# Altium PCB Socket.PcbDoc
Units mm, origin at the board's own origin, x right, y up, seen from the top; angles counter-clockwise.
Board outline 22.96 x 17.78 mm, 2 copper layers (F.Cu, B.Cu); 9 components, 4 nets, 53 pads, 44 vias.
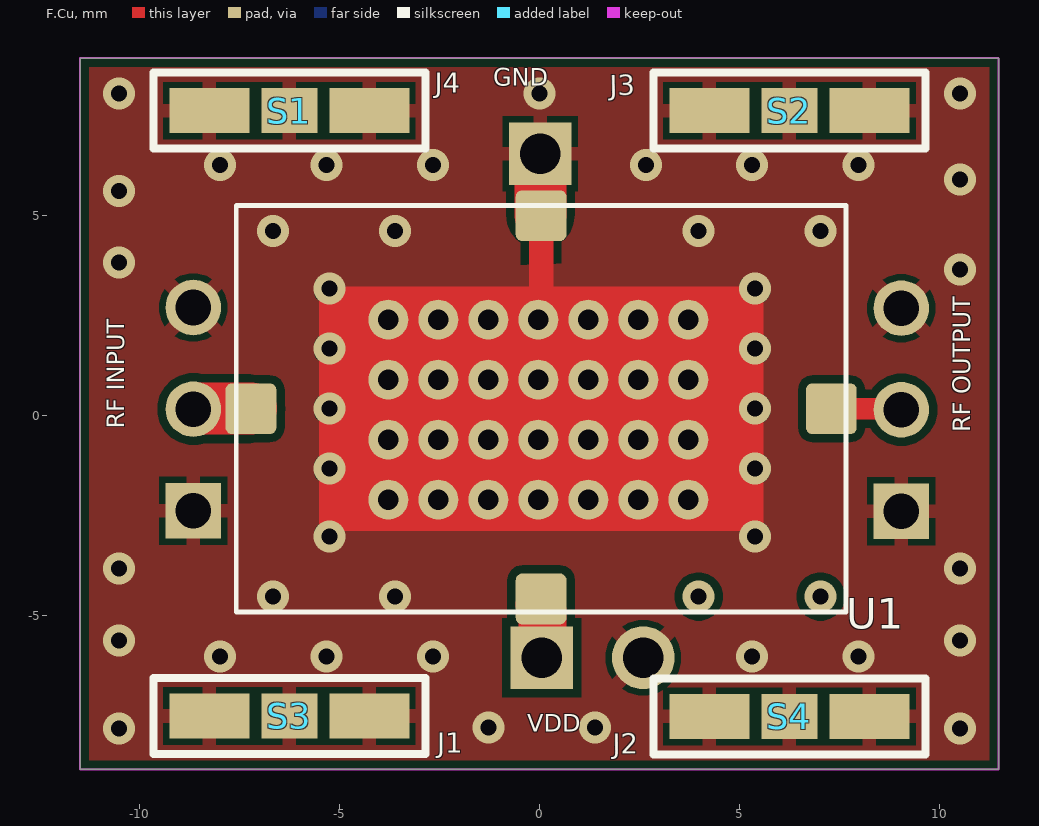
[diagram p0: F.Cu view]
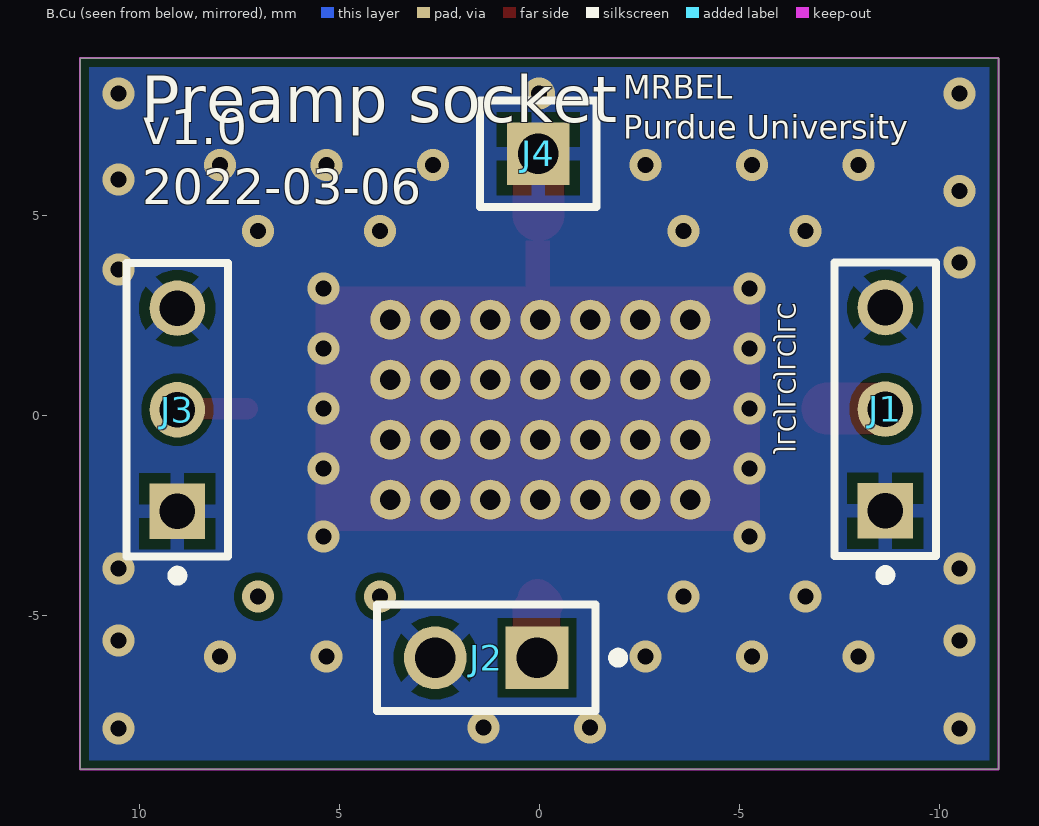
[diagram p1: B.Cu view, seen from below]
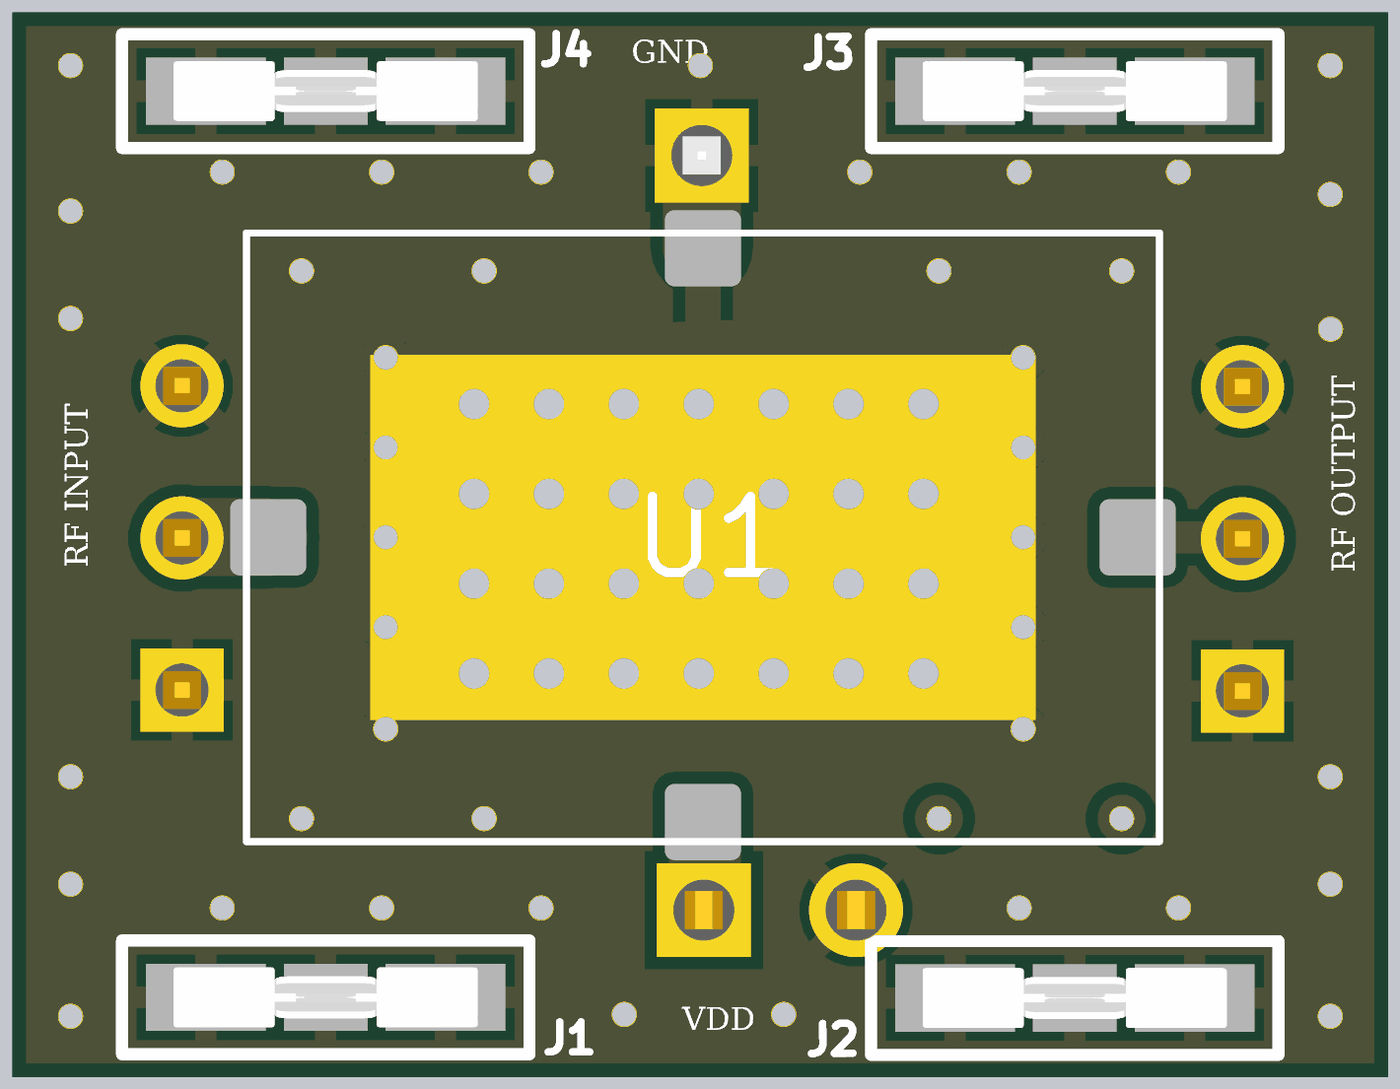
[diagram p2: 3D render of the assembled board from above, using the file's embedded part models]
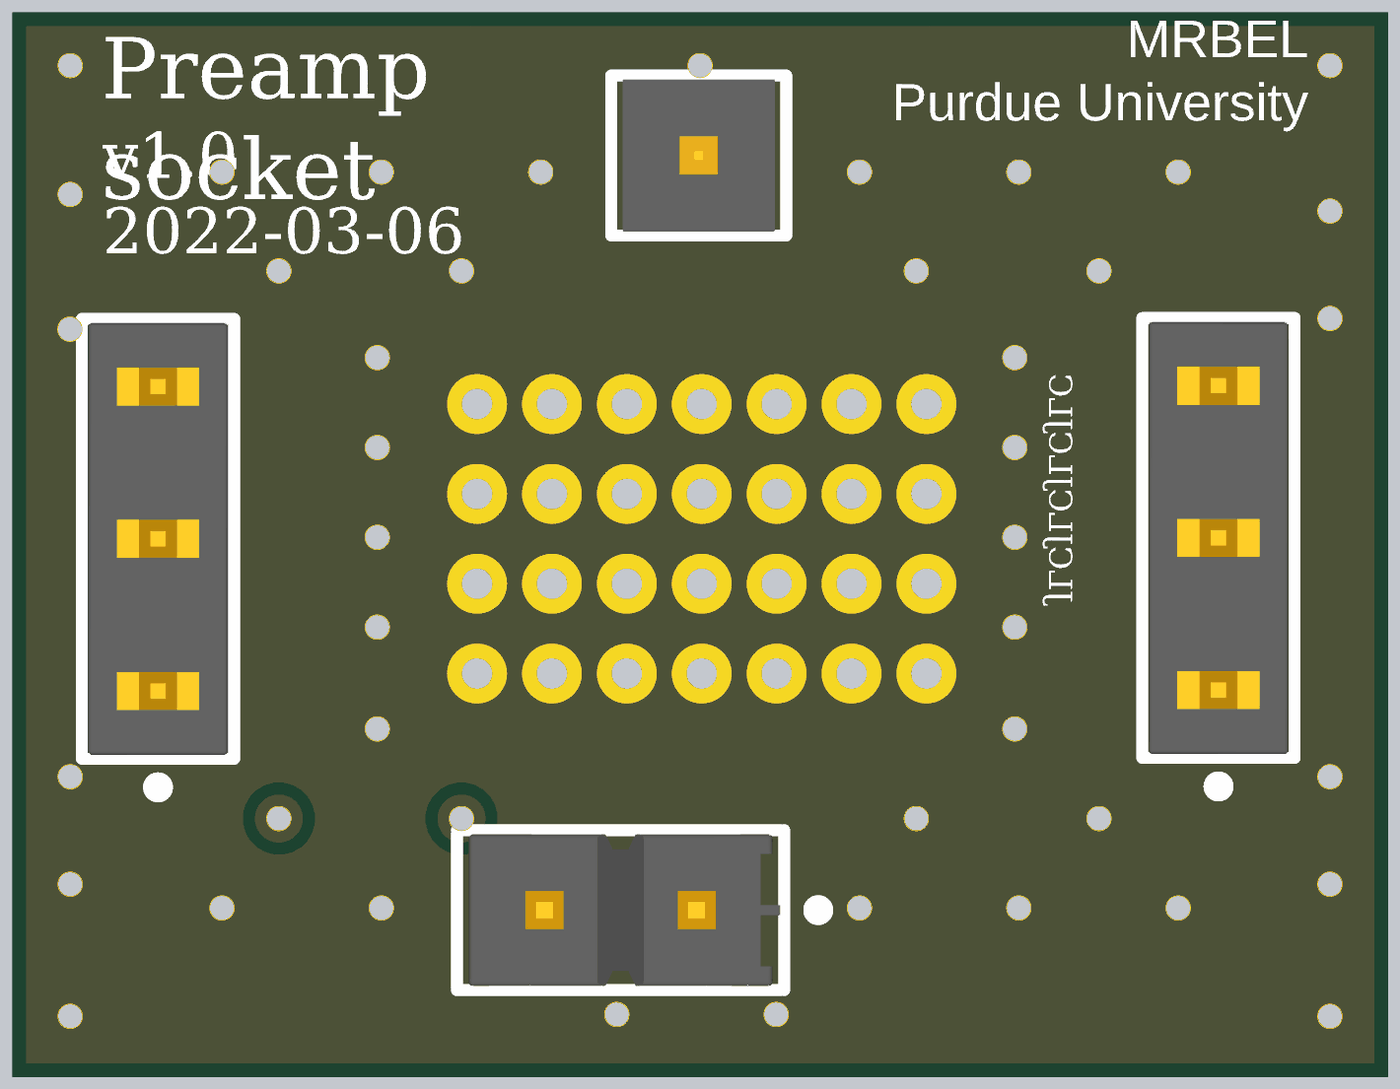
[diagram p3: 3D render of the assembled board from below, using the file's embedded part models]

## Layer stack, top to bottom
F.Mask: solder mask 0.0102, Solder Resist, Dk 3.5
F.Cu: signal copper 0.0356
Dielectric 1: dielectric 0.32, FR-4, Dk 4.8
B.Cu: signal copper 0.0356
B.Mask: solder mask 0.0102, Solder Resist, Dk 3.5

## Board outline
11.481,-8.839 -11.481,-8.839 -11.481,8.941 11.481,8.941 11.481,-8.839

## Design rules (kind name [scope] priority, off if disabled: settings)
Clearance [All] p1: gap=0.2 ignorepadtopadclearanceinfootprint=FALSE
HoleSize "Hole Size (Default)" [All] p1: absolutevalues=TRUE maxlimit=10 minlimit=0.3 maxpercent=80.000 minpercent=20.000
MinimumSolderMaskSliver [All] p1: minsoldermaskwidth=0
PolygonConnect Polygon_B.Cu-GND_ConnectDirect [IsNamedPolygon('B.Cu-GND') vs IsVia] p1: connectstyle=Direct reliefconductorwidth=0.254 reliefentries=4 polygonreliefangle="90 Angle" airgapwidth=0.254
PolygonConnect Polygon_B.Cu-GND_ConnectRelief45 [IsNamedPolygon('B.Cu-GND') vs (IsThruPin or IsSMTPin) and (PadShape_AllLayers = 'Round')] p2: connectstyle=Relief reliefconductorwidth=0.355 reliefentries=4 polygonreliefangle="45 Angle" airgapwidth=0.254
PolygonConnect Polygon_B.Cu-GND_ConnectRelief90 [IsNamedPolygon('B.Cu-GND') vs (IsThruPin or IsSMTPin) and (PadShape_AllLayers <> 'Round')] p3: connectstyle=Relief reliefconductorwidth=0.355 reliefentries=4 polygonreliefangle="90 Angle" airgapwidth=0.254
PolygonConnect Polygon_F.Cu-GND_ConnectDirect [IsNamedPolygon('F.Cu-GND') vs IsVia] p4: connectstyle=Direct reliefconductorwidth=0.254 reliefentries=4 polygonreliefangle="90 Angle" airgapwidth=0.254
PolygonConnect Polygon_F.Cu-GND_ConnectRelief45 [IsNamedPolygon('F.Cu-GND') vs (IsThruPin or IsSMTPin) and (PadShape_AllLayers = 'Round')] p5: connectstyle=Relief reliefconductorwidth=0.355 reliefentries=4 polygonreliefangle="45 Angle" airgapwidth=0.154
PolygonConnect Polygon_F.Cu-GND_ConnectRelief90 [IsNamedPolygon('F.Cu-GND') vs (IsThruPin or IsSMTPin) and (PadShape_AllLayers <> 'Round')] p6: connectstyle=Relief reliefconductorwidth=0.355 reliefentries=4 polygonreliefangle="90 Angle" airgapwidth=0.154
RoomDefinition Socket [InComponentClass('Socket')] p1 off: confinementstyle=ConfineIn formatcopy=TRUE lockcomponents=FALSE outline 14.5,17.225 21.775,17.225 21.775,12.075 14.5,12.075
RoutingVias [All] p1: holewidth=0.711 width=1.27 viastyle="Through Hole" minholewidth=0.711 minwidth=1.27 maxholewidth=0.711 maxwidth=1.27
SilkToSilkClearance [All] p1: silktosilkclearance=0
SilkToSolderMaskClearance [IsPad] p1: minsilkscreentomaskgap=0 clearancetoexposedcopper=TRUE
SolderMaskExpansion [All] p1: expansion=0.102 istentingtop=FALSE
Width "1.5 Ohm Width" [InNetClass('1.5 Ohm')] p1: maxlimit=5 minlimit=0.535 preferedwidth=0.535 impedanceprofiledriven=TRUE impedanceprofileid={217E9634-15FC-4B0A-ABE9-9CEC0D16363F} impedanceprofilevalue=50.000000 minimp=50.000000 maximp=50.000000 favimp=50.000000
Width "50 Ohm Width" [InNetClass('50 Ohm')] p2: maxlimit=0.535 minlimit=0.535 preferedwidth=0.535 impedanceprofiledriven=TRUE impedanceprofileid={217E9634-15FC-4B0A-ABE9-9CEC0D16363F} impedanceprofilevalue=50.000000 minimp=50.000000 maximp=50.000000 favimp=50.000000
26 further rules are at their usual default settings.

## Components (designator, comment, footprint, x,y, rotation, side; value= is the part's Value field where it differs from the comment)
J1 "Out" FP-87224-3-MFG -8.65,0.165 r90 bottom
J2 "Comment" FP-TSW-102-07-G-S-MFG 1.33,-6.05 r0 bottom
J3 "Out" FP-87224-3-MFG 9.05,0.15 r90 bottom
J4 "Comment" FP-TSW-101-07-F-S-MFG 0.025,6.55 r180 bottom
S1 "S0971-46R" FP-S0971-46R-MFG -6.251,7.625 r0 top
S2 "shield_clip" FP-S0971-46R-MFG 6.251,7.625 r0 top
S3 "S0971-46R" FP-S0971-46R-MFG -6.251,-7.506 r0 top
S4 "shield_clip" FP-S0971-46R-MFG 6.251,-7.516 r180 top
U1 "WMA" WMA-Footprint-1 0.172,0.175 r0 top

## Footprints (in the part's own frame and the unit in brackets; to place one, negate y for a bottom-side part, rotate by r counter-clockwise, add the part's x,y. Pads: shape width x height; smd on the part's side, far side on the other; paste and mask are expansions set on the pad)
FP-87224-3-MFG [mil]
  rect 54.69x54.69 hole 35 paste-39370.1 mask+0: 1(-100,0)
  round 54.69 hole 35 paste-39370.1 mask+0: 2(0,0) 3(100,0)
  silkscreen extent -168,-50 145,50, body extent -142,-46 142,46, height 428
FP-S0971-46R-MFG [mm]
  rect 2x1.125 smd paste+0 mask+0: 1(-2,0) 1(2,0)
  rect 1.4x1.125 smd paste+0 mask+0: 1(0,0)
  silkscreen extent -3.4,-0.95 3.4,0.95, body extent -3.1,-0.66 3.1,0.66, height 0.25
FP-TSW-101-07-F-S-MFG [mm]
  rect 1.57x1.57 hole 1.02 paste-1000 mask+0: 1(0,0)
  silkscreen extent -1.46,-1.34 1.46,1.34, body extent -1.27,-1.27 1.27,1.27, height 8.71
FP-TSW-102-07-G-S-MFG [mm]
  rect 1.57x1.57 hole 1.02 paste-1000 mask+0: 1(-1.27,0)
  round 1.57 hole 1.02 paste-1000 mask+0: 2(1.27,0)
  silkscreen extent -3.42,-1.34 2.73,1.34, body extent -2.67,-1.27 2.54,1.27, height 8.71
WMA-Footprint-1 [mil]
  rrect25% 50x50 smd mask+0: 1(-290.63,0) 2(-5,-187.2) 3(280.63,0) 4(-5,190)
  F.Cu region: 213.5,-120.08 -223.5,-120.08 -223.5,120.08 213.5,120.08
  F.Cu region: 6.81,118.11 -16.81,118.11 -16.81,165.35 6.81,165.35
  silkscreen extent -305,-200 295,200

## Part data
J1 J3: library part CMP-2000-05697-2, "CONN HEADER VERT 3POS 2.54MM", Color=Black, Contact Current Rating=3A, Flammability Rating="UL94 V-0", High Temperature Housing=No, Max Operating Temperature=105°C, Min Operating Temperature=-65°C, Package Quantity=520, Approvals=CSA, Board Standoff="No (Without)", Connector Type=Plug, Contact Gender=Male, Contact Material=Bronze, Contact Mating Length=8.08mm, Contact Plating=Gold, Contact Post Length=0.125inch, Contact Protection="No (Without)", Contact Shape=Square, Contact Type="Male Pin", Current Rating=3A, Depth=2.54mm, ELV=Compliant, Gasket="No (Without)", High Speed Serial Data Connector=No, Housing Color=Black, Housing Material=Thermoplastic, Keyed=No, Lead Free="Lead Free", Length=7.21mm, Mating Alignment="No (Without)", Mating Connector Lock="No (Without)", Mount="Through Hole", Number Of Contacts=3, Number of Positions=3, Number of Rows=1, Orientation=Straight, Packaging=Carton, PCB Mount Retention=Without, PCB Mounting Orientation=Vertical, PCB Thickness=1.397mm, Pitch=2.54mm, Radiation Hardening=No, RoHS Compliant=Yes, Row Spacing=2.54mm, Selectively Loaded="No (Without)", Series="AMPMODU MOD II", Stabilizers="No (Without)", Strain Relief="No (Without)", Termination="Through Hole"
J2: library part CMP-02766-000084-1, "CONN HEADER VERT 2POS 2.54MM", Current Rating=6.3A, Manufacturer=Samtec, Manufacturer Part Number=TSW-102-07-G-S, Temperature="-55°C to +125°C", Temperature Range High=+125°C, Temperature Range Low=-55°C, Voltage Rating=550V, Automotive=No, Category=Conn, ComponentLink2Description=Datasheet, ComponentLink2URL=http://suddendocs.samtec.com/catalog_english/tsw_th.pdf, Conn Gender=Male, Conn Orientation=Straight, Contact Material=Gold,Nickel, Device Class L1=Connectors, Device Class L2="Headers and Wire Housings", Device Class L3=unset, Digikey Description="CONN HEADER VERT 2POS 2.54MM", Footprint Url=http://suddendocs.samtec.com/prints/tsw-xxx-xx-x-x-xx-xxx-footprint.pdf, Height=8.71mm, Lead Free=Yes, Mouser Description="Conn Unshrouded Header HDR 2 POS 2.54mm Solder ST Thru-Hole Automotive Bulk", Number Of Contacts=2, Number of Rows=1, Octopart=https://octopart.com/tsw-102-07-g-s-samtec-272197, Package=TSW-102-07-G-S, Pitch=2.54mm, RoHS=TRUE
J4: library part CMP-02766-001403-1, "CONN HEADER VERT 1POS", Flammability Rating="UL94 V-0", Insulation Color=Black, Max Operating Temperature=125°C, Min Operating Temperature=-55°C, Connector Type=Header, Contact Finish - Mating=GOLD, Contact Material=Bronze, Contact Plating=Gold, Contact Shape=Square, Contact Type="Male Pin", Fastening Type=Pull, Gender=Male, Insulation Material=PBT, Mount="Through Hole", Number Of Contacts=1, Number of Positions=1, Number of Rows=1, Packaging=Bulk, Radiation Hardening=No, REACH SVHC="No SVHC", RoHS Compliant=Yes, Series=TSW, Termination=Solder
S1 S3: library part CMP-15817-000004-1, "RFI SHIELD CLIP MINI TIN SMD", Manufacturer=Harwin, Temperature="-25°C to +150°C", Temperature Range High=+150°C, Temperature Range Low=-25°C, Automotive=No, Category=UNK, ComponentLink2Description=Datasheet, ComponentLink2URL=https://cdn.harwin.com/pdfs/S0971-46R.pdf, Conn Orientation=Vertical, Contact Material=Tin,Nickel, Device Class L1=Connectors, Device Class L2=unset, Device Class L3=unset, Digikey Description="RFI SHIELD CLIP MINI TIN SMD", Height=2.1mm, Is Female=yes, Lead Free=Yes, Manufacturer Part Number=S0971-46R, Mouser Description="EZ-Shield Clip, SMT, Mini, Stainless Steel, tin, Tape & Reeled", Number Of Contacts=1, Octopart=https://octopart.com/s0971-46r-harwin-30988305, Package=S0971-46R, RoHS=TRUE
S2 S4: library part CMP-15817-000004-1, "RFI SHIELD CLIP MINI TIN SMD", Manufacturer=Harwin, Manufacturer Part Number=S0971-46R, Temperature="-25°C to +150°C", Temperature Range High=+150°C, Temperature Range Low=-25°C, Automotive=No, Category=UNK, ComponentLink2Description=Datasheet, ComponentLink2URL=https://cdn.harwin.com/pdfs/S0971-46R.pdf, Conn Orientation=Vertical, Contact Material=Tin,Nickel, Device Class L1=Connectors, Device Class L2=unset, Device Class L3=unset, Digikey Description="RFI SHIELD CLIP MINI TIN SMD", Height=2.1mm, Is Female=yes, Lead Free=Yes, Mouser Description="EZ-Shield Clip, SMT, Mini, Stainless Steel, tin, Tape & Reeled", Number Of Contacts=1, Octopart=https://octopart.com/s0971-46r-harwin-30988305, Package=S0971-46R, RoHS=TRUE
U1: library part CMP-014-00002-11, "WanTcom SMT Series Preamplifiers  0.6\"x0.4\" footprint"

## Free pads (board coordinates)
  round 1 hole 0.508 paste-1 mask+0: 4(-3.775,-2.1) 4(-3.775,-0.6) 4(-3.775,0.9) 4(-3.775,2.4) 4(-2.525,-2.1) 4(-2.525,-0.6) 4(-2.525,0.9) 4(-2.525,2.4) 4(-1.275,-2.1) 4(-1.275,-0.6) 4(-1.275,0.9) 4(-1.275,2.4) 4(-0.025,-2.1) 4(-0.025,-0.6) 4(-0.025,0.9) 4(-0.025,2.4) 4(1.225,-2.1) 4(1.225,-0.6) 4(1.225,0.9) 4(1.225,2.4) 4(2.475,-2.1) 4(2.475,-0.6) 4(2.475,0.9) 4(2.475,2.4) 4(3.725,-2.1) 4(3.725,-0.6) 4(3.725,0.9) 4(3.725,2.4)

## Via types
v1: diameter 0.8, hole 0.4, F.Cu to B.Cu, tented both sides, 44 vias

## Nets (pads, with @x,y where several pads share a name; then routed paths per layer and width w, separated by ;. In a path a pad name is that pad's centre, name@x,y a point inside that pad or via, vN(x,y) a via of type N, cw(c..) or ccw(c..) an arc to the next point about the centre after c; other vN are vias at no path point)
GND: J1.1 J1.3 J2.2 J3.1 J3.3 J4.1 pad.4 S1.1 S2.1 S3.1 S4.1 U1.4 | length 1.7
  F.Cu w0.254: J4.1@-0.068,6.496 cw(c-0.014,6.496) -0.014,6.55 J4.1 ; U1.4@0.025,5.021 ccw(c0.045,5.021) U1.4 0.05,5.001 U1.4@0.05,5.025
  F.Cu w1.3: U1.4@0.025,5.021 J4.1
  other v1: -10.51,-7.823 10.516,-7.823 -1.267,-7.792 1.393,-7.792 -7.977,-6.014 -5.317,-6.014 -2.657,-6.014 5.323,-6.014 7.983,-6.014 -10.51,-5.617 10.516,-5.617 -6.655,-4.521 -3.607,-4.521 -10.51,-3.823 10.516,-3.823 -5.25,-3.025 5.39,-3.025 -5.25,-1.325 5.39,-1.325 -5.25,0.175 5.39,0.175 -5.25,1.675 5.39,1.675 -5.25,3.175 5.39,3.175 10.52,3.65 -10.51,3.829 -6.655,4.623 -3.607,4.623 3.985,4.623 7.033,4.623 -10.51,5.623 10.516,5.9 -7.977,6.274 -5.317,6.274 -2.657,6.274 2.663,6.274 5.323,6.274 7.983,6.274 -10.51,8.052 0.003,8.052 10.516,8.052
NetJ1_2: J1.2 U1.1 | length 1.5
  F.Cu w0.535: J1.2 -8.55,0.165 J1.2@-8.55,0.175
  F.Cu w1.3: J1.2@-8.55,0.175 U1.1
NetJ3_2: J3.2 U1.3 | length 1.8
  F.Cu w0.535: U1.3 9.025,0.175 cw(c9.025,0.15) J3.2
VDD: J2.1 U1.2 | length 1.8
  F.Cu w0.254: U1.2@-0.09,-4.715 cw(c-0.09,-4.88) U1.2@0.075,-4.88 ; U1.2 cw(c0.045,-4.66) U1.2@0.125,-4.66 ; J2.1 J2.1@0.075,-6.05
  F.Cu w1: U1.2@-0.09,-4.715 U1.2
  F.Cu w1.2: J2.1@0.075,-6.05 U1.2@0.075,-4.88
copper on no net:
  other v1: 3.985,-4.521 7.033,-4.521

## Polygon pours and split planes (outlines as drawn)
GND on F.Cu "F.Cu-GND" (solid, pour order 3): -11.375,8.95 -11.375,-8.825 11.6,-8.825 11.6,8.95 ccw(c11.588,8.937)
GND on F.Cu "GND_L01_P002" (solid, pour order 2): -6.05,3.575 -6.05,-3.65 ccw(c-5.975,-3.65) -5.975,-3.65 6.525,-3.725 6.954,4.023
GND on B.Cu "GND_L02_P004" (solid, pour order 4): -4.75,3.25 -4.75,-3.075 ccw(c-4.45,-3.075) -4.45,-3.375 cw(c-4.275,-3.375) -4.275,-3.2 4.75,-3.2 cw(c4.75,-3.075) 4.625,-3.075 4.625,3.65
GND on B.Cu "B.Cu-GND" (solid, pour order 0): -11.5,8.95 -11.5,-8.825 11.475,-8.825 11.475,8.95 ccw(c11.463,8.937)

## Keep-outs
Edge.Cuts:
  lines w0.05: -11.481,-8.839 11.481,-8.839 ; -11.481,-8.839 11.481,-8.839 ; -11.481,-8.839 -11.481,8.941 ; -11.481,-8.839 -11.481,8.941 ; -11.481,8.941 11.481,8.941 ; -11.481,8.941 11.481,8.941 ; 11.481,-8.839 11.481,8.941 ; 11.481,-8.839 11.481,8.941

## Silkscreen, mask and mechanical layers (free items; w line width, h text height)
F.SilkS:
  text "GND" at -1.15,8.1 h0.75
  text "RF INPUT" at -10.225,-0.325 h0.75 r90
  text "RF OUTPUT" at 10.922,-0.41 h0.75 r90
  text "VDD" at -0.3,-8.05 h0.75
B.SilkS:
  text "Preamp socket" at 9.95,6.95 h2
  text "MRBEL / Purdue University" at -2.1,6.725 h1
  text "v1.0 / 2022-03-06" at 9.925,5 h1.5
  text "JLCJLCJLCJLC" at -5.825,-0.925 h0.75 r90